# Altium PCB miwi.PcbDoc
Units mil, origin at the board's own origin, x right, y up, seen from the top; angles counter-clockwise.
Board outline 6000 x 4000 mil, 2 copper layers (Top Layer, Bottom Layer); 28 components, 35 nets, 108 pads, 0 vias.
Unrouted connection lines stored in the file: 2.
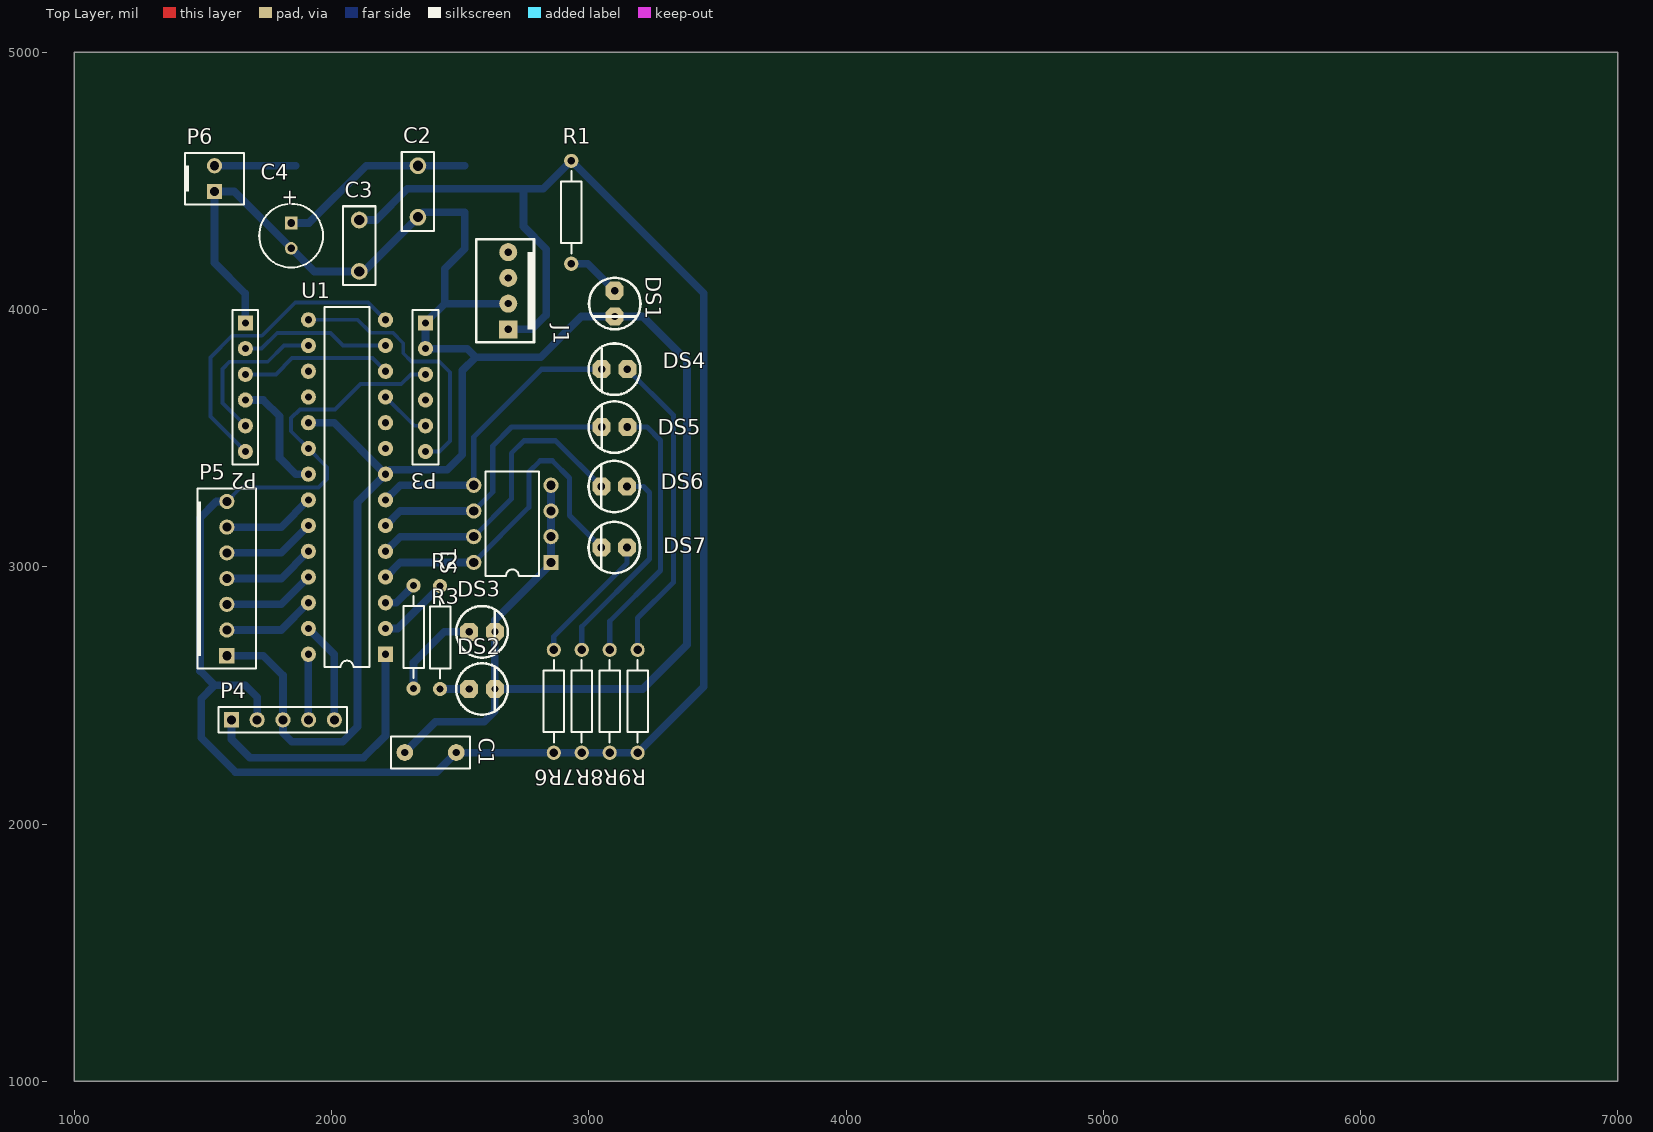
[diagram p0: Top Layer view]
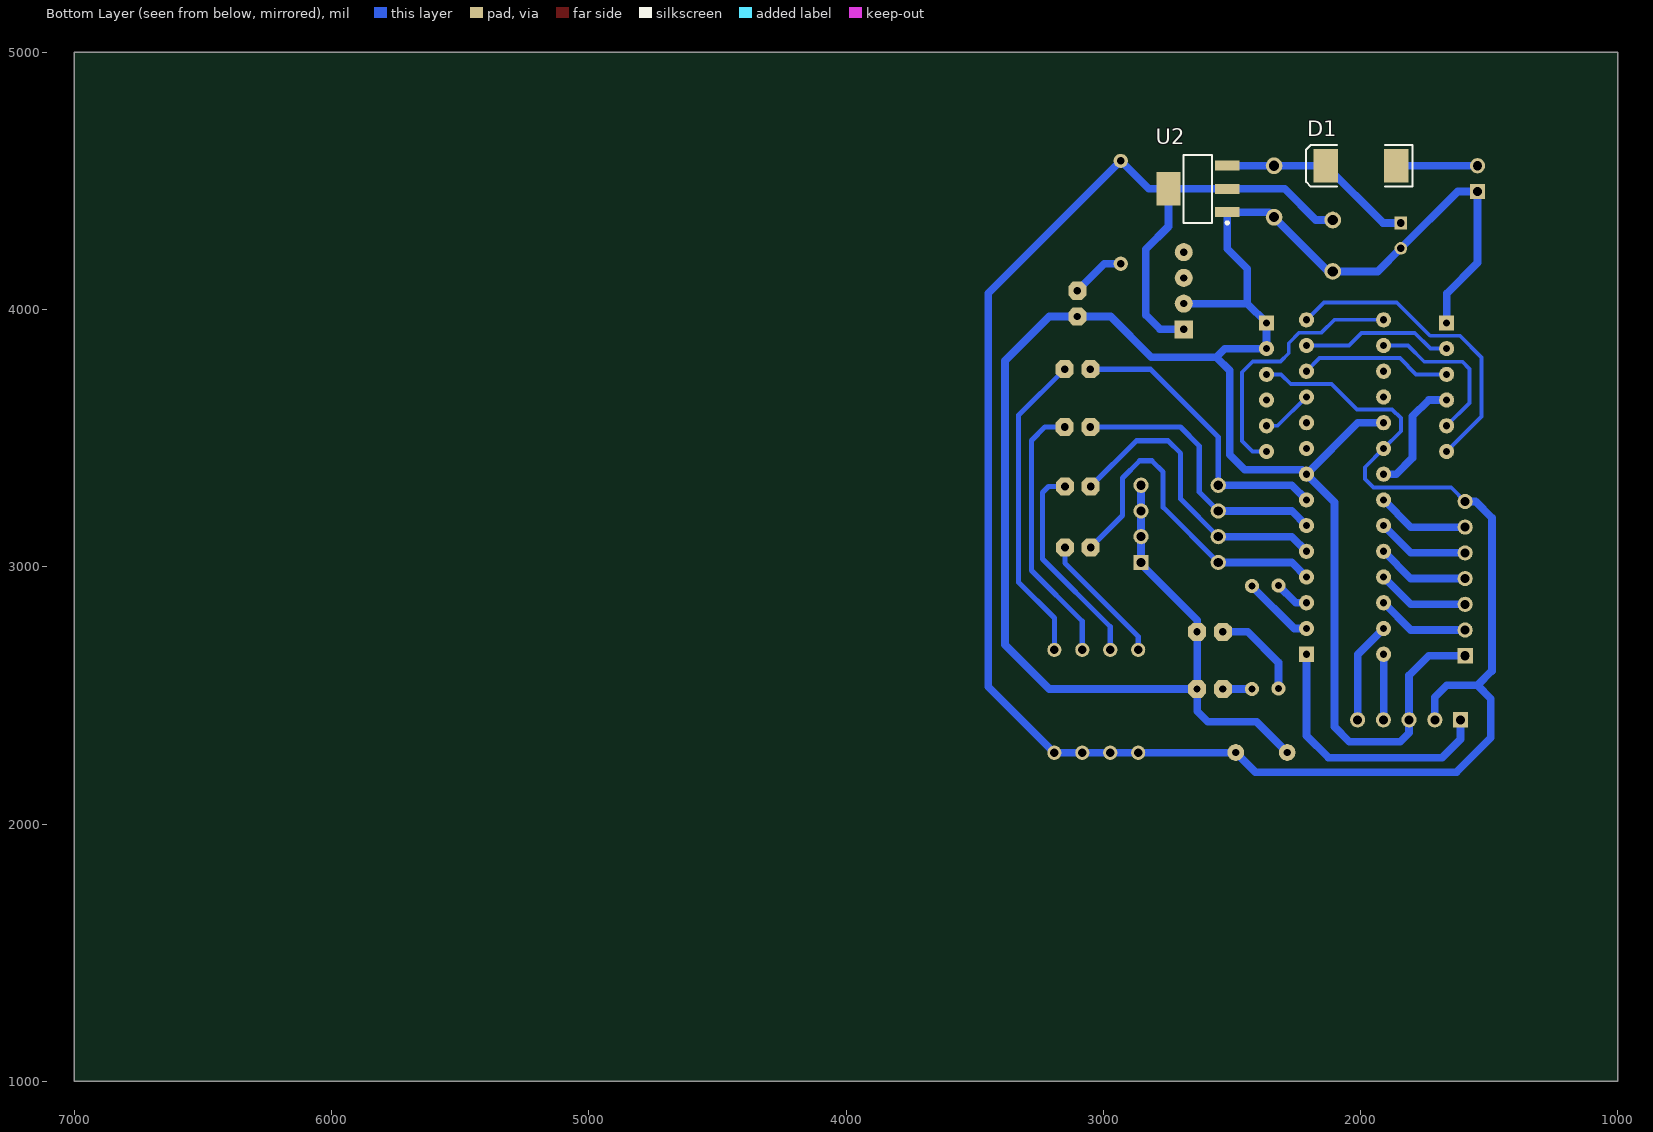
[diagram p1: Bottom Layer view, seen from below]

## Layer stack, top to bottom
Top Layer: signal copper 1.4
Dielectric: dielectric 12.6, FR-4, Dk 4.8
Bottom Layer: signal copper 1.4

## Board outline
1000,1000 7000,1000 7000,5000 1000,5000

## Design rules (kind name [scope] priority, off if disabled: settings)
Clearance ground_plane [(IsRegion AND InNet('GND'))] p1: gap=20
Clearance [All] p2: gap=5
ComponentClearance [All] p1: gap=5 collisioncheckmode=3 verticalgap=10 showdistances=FALSE
FabricationTestPointUsage TestPointUsage [All] p1: valid=0 allowmultiple=FALSE
FabricationTestpoint Testpoint [All] p1: side=3 testpointundercomponent=TRUE minsize=40 maxsize=100 preferedsize=60 minholesize=0 maxholesize=40 preferedholesize=32 testpointgrid=1 allowsidetop=TRUE allowsidebottom=TRUE usegrid=TRUE gridtolerance=0.01
PolygonConnect [All] p1: connectstyle=Relief reliefconductorwidth=10 reliefentries=4 polygonreliefangle="90 Angle"
RoutingVias [All] p1: holewidth=28 width=50 viastyle="Through Hole" minholewidth=28 minwidth=50 maxholewidth=28 maxwidth=50
SilkscreenOverComponentPads [All] p1: minsilkscreentomaskgap=10
SolderMaskExpansion [All] p1: expansion=4
Width [All] p1: maxlimit=30 minlimit=10 preferedwidth=30
24 further rules are at their usual default settings.

## Components (designator, comment, footprint, x,y, rotation, side; value= is the part's Value field where it differs from the comment)
C1 "" CAPR5.08-7.8x3.2#1 2385,2278 r0 top
C2 "" CAPR5.08-7.8x3.2#2 2336,4459 r90 top
C3 "" CAPR5.08-7.8x3.2#2 2108,4248 r90 top
C4 "" CAPPR2.5-6.3x5 1843,4287 r270 top
D1 "MULTICOMP - S3J - DIODE, STANDARD, 3A, 600V, SMD" SMC 1998,4559 r0 bottom
DS1 "LED" LED#1 3101,4073 r270 top
DS2 "LED" LED#1 2535,2525 r0 top
DS3 "LED" LED#1 2535,2747 r0 top
DS4 "LED" LED#2 3150,3768 r180 top
DS5 "LED" LED#2 3150,3543 r180 top
DS6 "LED" LED#2 3149,3312 r180 top
DS7 "LED" LED#2 3149,3075 r180 top
J1 "MOLEX4" MOLEX4 2687,3923 r270 top
P2 "Header 6" HDR1X6 1665,3948 r270 top
P3 "Header 6" HDR1X6 2365,3948 r270 top
P4 "ICSP" HDR1X5 1611,2405 r0 top
P5 "PS2" "KK Header 6410-7" 1593,2654 r90 top
P6 "12V Input" "KK Header 6410-2" 1545,4459 r90 top
R1 "" AXIAL-0.4#1 2932,4378 r90 top
R2 "" AXIAL-0.4#1 2422,2725 r90 top
R3 "" AXIAL-0.4#1 2319,2727 r90 top
R6 "Res2" AXIAL-0.4#2 2864,2477 r270 top
R7 "Res2" AXIAL-0.4#2 2972.67,2477 r270 top
R8 "Res2" AXIAL-0.4#2 3081.33,2477 r270 top
R9 "Res2" AXIAL-0.4#2 3190,2477 r270 top
S1 "SW-DIP4" DIP-8 2703,3167 r90 top
U1 "PIC18F25K20" PDIP-28 2060,3310 r90 top
U2 "LD1117S33CTR" MP04A_N 2632,4469 r0 bottom

## Footprints (in the part's own frame and the unit in brackets; to place one, negate y for a bottom-side part, rotate by r counter-clockwise, add the part's x,y. Pads: shape width x height; smd on the part's side, far side on the other; paste and mask are expansions set on the pad)
AXIAL-0.4#1 [mm] "Resistor; 2 Leads"
  round 1.4 hole 0.711: 1(-5.08,0) 2(5.08,0)
  silkscreen extent -4.06,-1.02 4.06,1.02
AXIAL-0.4#2 [mm] "Resistor; 2 Leads"
  round 1.4 hole 0.85: 1(-5.08,0) 2(5.08,0)
  silkscreen extent -4.06,-1.02 4.06,1.02
CAPPR2.5-6.3x5 [mm] "Capacitor, Electrolytic, Radial; Body 6.3 x 5 mm (Dia.xH typ); Pin Spacing 2.5 mm (typ)"
  rect 1.25x1.25 hole 0.75: 1(-1.25,0)
  round 1.25 hole 0.75: 2(1.25,0)
  silkscreen extent -3.15,-3.15 3.15,3.15
CAPR5.08-7.8x3.2#1 [mm] "Capacitor, Ceramic, Thru-Hole, Dipped Radial; Body 7.8 x 3.2 mm (WxT) Pin Spacing 5.08 mm (typ)"
  round 1.65 hole 0.711: 1(-2.54,0) 2(2.54,0)
  silkscreen extent -3.9,-1.6 3.9,1.6
CAPR5.08-7.8x3.2#2 [mm] "Capacitor, Ceramic, Thru-Hole, Dipped Radial; Body 7.8 x 3.2 mm (WxT) Pin Spacing 5.08 mm (typ)"
  round 1.65 hole 1: 1(-2.54,0) 2(2.54,0)
  silkscreen extent -3.9,-1.6 3.9,1.6
DIP-8 [mm] "DIP; 8 Leads; Row Spacing 7.62 mm; Pitch 2.54 mm"
  rect 1.5x1.5 hole 0.9: 1(-3.81,-3.81)
  round 1.5 hole 0.9: 2(-1.27,-3.81) 3(1.27,-3.81) 4(3.81,-3.81) 5(3.81,3.81) 6(1.27,3.81) 7(-1.27,3.81) 8(-3.81,3.81)
  silkscreen extent -5.15,-2.65 5.15,2.65
HDR1X5 [mm] "Connector; Header; 5 Position"
  rect 1.5x1.5 hole 0.9: 1(0,0)
  round 1.5 hole 0.9: 2(2.54,0) 3(5.08,0) 4(7.62,0) 5(10.16,0)
  silkscreen extent -1.27,-1.27 11.43,1.27
HDR1X6 [mm] "Connector; Header; 6 Position"
  rect 1.5x1.5 hole 0.711: 1(0,0)
  round 1.5 hole 0.711: 2(2.54,0) 3(5.08,0) 4(7.62,0) 5(10.16,0) 6(12.7,0)
  silkscreen extent -1.27,-1.27 13.97,1.27
"KK Header 6410-2" [mm]
  rect 1.5x1.5 hole 0.9: 1(0,0)
  round 1.5 hole 0.9: 2(2.54,0)
  silkscreen extent -1.27,-2.9 3.81,2.9
"KK Header 6410-7" [mm]
  rect 1.5x1.5 hole 0.9: 1(0,0)
  round 1.5 hole 0.9: 2(2.54,0) 3(5.08,0) 4(7.62,0) 5(10.16,0) 6(12.7,0) 7(15.24,0)
  silkscreen extent -1.27,-2.9 16.51,2.9
LED#1 [mil]
  oct 70x70 hole 28: 1(0,0) 2(100,0)
  silkscreen extent -50,-100 150,100
LED#2 [mil]
  oct 70x70 hole 30: 1(0,0) 2(100,0)
  silkscreen extent -50,-100 150,100
MOLEX4 [mil] "MOLEX4"
  rect 70x70 hole 28: 1(0,0)
  round 70 hole 28: 2(-100,0) 3(-200,0) 4(-300,0)
  silkscreen extent -350,-125 50,100
MP04A_N [mm] "SOT223, 4-Leads, Body 6.5x3.5mm, Pitch 2.3mm, Lead Span 7mm, IPC Medium Density"
  rect 2.4x1 smd: 1(-2.9,2.3) 2(-2.9,0) 3(-2.9,-2.3)
  rect 2.4x3.3 smd: 4(2.9,0)
  silkscreen extent -3.02,-3.35 1.4,3.47, body extent -1.85,-3.35 1.85,3.35, height 1.8
PDIP-28 [mm] "PDIP-28"
  rect 1.5x1.5 hole 0.711: 1(-16.51,-3.81)
  round 1.5 hole 0.711: 2(-13.97,-3.81) 3(-11.43,-3.81) 4(-8.89,-3.81) 5(-6.35,-3.81) 6(-3.81,-3.81) 7(-1.27,-3.81) 8(1.27,-3.81) 9(3.81,-3.81) 10(6.35,-3.81) 11(8.89,-3.81) 12(11.43,-3.81) 13(13.97,-3.81) 14(16.51,-3.81) 15(16.51,3.81) 16(13.97,3.81) 17(11.43,3.81) 18(8.89,3.81) 19(6.35,3.81) 20(3.81,3.81) 21(1.27,3.81) 22(-1.27,3.81) 23(-3.81,3.81) 24(-6.35,3.81) 25(-8.89,3.81) 26(-11.43,3.81) 27(-13.97,3.81) 28(-16.51,3.81)
  silkscreen extent -17.78,-2.23 17.78,2.23
SMC [mm] "DO-214-AB/SMC; 2 C-Bend Leads; Body 7.9 x 5.9 mm, inc. leads (LxW)"
  rect 2.4x3.3 smd: 1(-3.475,0) 2(3.475,0)
  silkscreen extent -5.07,-2.05 5.43,2.05

## Part data
C1 C2 C3: library part Cap, "Capacitor"
C4: library part "Cap Pol1", "Polarized Capacitor (Radial)"
D1: library part Diode, "Default Diode"
P2 P3: "Header, 6-Pin"
P4: library part "Header 5", "Header, 5-Pin"
P5: library part "Header 7 Type 1", "Header, 7-Pin, KK Header 6410, 100mil"
P6: library part "Header 2 Type 1", "Header, 2-Pin, KK Header 6410, 100mil"
R1 R2 R3: library part Res2, "Resistor"
R6 R7 R8 R9: "Resistor"
S1: "DIP Switch"
U2: library part LM1117IMPX-3.3, "800mA Low-Dropout Linear Regulator, 4-pin SOT-223"

## Nets (pads, with @x,y where several pads share a name; then routed paths per layer and width w, separated by ;. In a path a pad name is that pad's centre, name@x,y a point inside that pad or via, vN(x,y) a via of type N, cw(c..) or ccw(c..) an arc to the next point about the centre after c; other vN are vias at no path point)
12V: C2.2 C4.1 D1.2 U2.3 | length 766.6
  Bottom Layer w30: C4.1 1912.02,4336.21 D1.2 C2.2 U2.3@2517.28,4559
/CS: P3.5 U1.11 | length 201.4
  Bottom Layer w15: U1.11 2322,3548 P3.5
/MIWI_RST: P2.2 U1.13 | length 590.6
  Bottom Layer w15: P2.2 1728,3848 1789,3909 1996,3909 2045,3860 U1.13
ACK: P5.2 U1.26 | length 360.9
  Bottom Layer w30: P5.2 1804,2754 U1.26
ATT: P5.3 U1.25 | length 360.9
  Bottom Layer w30: P5.3 1804,2854 U1.25
CLKOUT: P3.4
CLOCK: P5.6 U1.22 | length 360.9
  Bottom Layer w30: P5.6 1804,3154 U1.22
CMD: P5.5 U1.23 | length 360.9
  Bottom Layer w30: P5.5 1804,3054 U1.23
DATA: P5.4 U1.24 | length 360.9
  Bottom Layer w30: P5.4 1804,2954 U1.24
GND: C1.1 C2.1 C3.1 C4.2 DS1.2 DS2.2 DS3.2 J1.2 P2.1 P3.1 P3.2 P4.3 P5.1 P6.1 S1.1 S1.2 S1.3 S1.4 U1.8 U1.19 U2.1 | length 10012.7
  Bottom Layer w30: P5.1 1735,2654 1811,2578 P4.3 1811,2355 1846,2320 2043,2320 2101,2378 2101,3251 U1.8 ; P2.1 1665,4062 1545,4182 P6.1 1621.79,4459 C4.2 1932.79,4148 C3.1 2125,4148 C2.1 2355.45,4378.45 U2.1 2517.83,4235.83 2440,4158 2440,4023 ; U1.19 2010,3560 U1.8 ; C1.1 2404,2397 2593,2397 2635,2439 DS2.2 ; J1.2 2440,4023 ; S1.1 S1.2 S1.3 S1.4 ; S1.1@2856.5,3013.5 2635,2792 DS3.2 DS2.2 ; U1.8 2227,3377 2450,3377 2508,3435 2508,3763 2560,3815 ; 2440,4023 P3.1 P3.2 2527,3848 2560,3815 ; 2560,3815 2813,3815 2971,3973 DS1.2 3210,3973 3382,3801 3382,2697 3210,2525 DS2.2
INT: P2.4 U1.21 | length 459.2
  Bottom Layer w30: P2.4 1735,3648 1798,3585 1798,3423 1861,3360 U1.21
MCU_RX: J1.4 U1.18
MCU_TX: J1.3 U1.17
NetD1_1: D1.1 P6.2 | length 316.2
  Bottom Layer w30: P6.2 D1.1
NetDS1_1: DS1.1 R1.1 | length 212.5
  Bottom Layer w30: R1.1 2996,4178 DS1.1
NetDS2_1: DS2.1 R2.1 | length 113
  Bottom Layer w30: R2.1 DS2.1
NetDS3_1: DS3.1 R3.1 | length 366.3
  Bottom Layer w30: R3.1 2319,2628 2438,2747 DS3.1
NetDS4_1: DS4.1 R9.1 | length 1222.7
  Bottom Layer w20: DS4.1 3329,3589 3329,2940 3190,2801 R9.1
NetDS4_2: DS4.2 S1.5 U1.7 | length 1160.5
  Bottom Layer w20: S1.5 2553,3505 2816,3768 DS4.2
  Bottom Layer w30: U1.7 2267,3317 S1.5
NetDS5_1: DS5.1 R8.1 | length 1046.4
  Bottom Layer w20: R8.1 3081.33,2788.33 3279,2986 3279,3491 3227,3543 DS5.1
NetDS5_2: DS5.2 S1.6 U1.6 | length 1103.5
  Bottom Layer w20: S1.6 2627,3291 2627,3470 2700,3543 DS5.2
  Bottom Layer w30: U1.6 2267,3217 S1.6
NetDS6_1: DS6.1 R7.1 | length 817.6
  Bottom Layer w20: R7.1 2972.67,2766.67 3236,3030 3236,3289 3213,3312 DS6.1
NetDS6_2: DS6.2 S1.7 U1.5 | length 1195.1
  Bottom Layer w20: S1.7 2699,3263 2699,3441 2748,3490 2871,3490 DS6.2
  Bottom Layer w30: U1.5 2267,3117 S1.7
NetDS7_1: DS7.1 R6.1 | length 516.1
  Bottom Layer w20: R6.1 2864,2729 3149,3014 DS7.1
NetDS7_2: DS7.2 S1.8 U1.4 | length 1331.6
  Bottom Layer w20: S1.8 2767,3231 2767,3368 2811,3412 2858,3412 2925,3345 2925,3199 DS7.2
  Bottom Layer w30: U1.4 2267,3017 S1.8
NetR2_2: R2.2 U1.2 | length 280.3
  Bottom Layer w30: U1.2 2257,2760 R2.2
NetR3_2: R3.2 U1.3 | length 136.8
  Bottom Layer w30: U1.3 2252,2860 R3.2
PGC: P4.5 U1.27 | length 396.8
  Bottom Layer w30: U1.27 2011,2659 P4.5
PGD: P4.4 U1.28 | length 254
  Bottom Layer w30: P4.4@1910,2406 U1.28
SCK: P2.6 U1.14 | length 1220.1
  Bottom Layer w15: P2.6 1529,3584 1529,3814 1613,3898 1729,3898 1859,4028 2142,4028 U1.14
SDI: P2.5 U1.16 | length 629.6
  Bottom Layer w15: P2.5 1576,3637 1576,3769 1604,3797 1752,3797 1815,3860 U1.16
SDO: P3.6 U1.15 | length 1038.3
  Bottom Layer w15: U1.15 2102,3960 2152,3910 2238,3910 2279,3869 2279,3830 2311,3798 2419,3798 2461,3756 2461,3489 2420,3448 P3.6
VCC: C1.2 C3.2 J1.1 P3.3 P4.2 P5.7 R1.2 R6.2 R7.2 R8.2 R9.2 U1.20 U2.2 U2.4 | length 8638.2
  Bottom Layer w15: P5.7 1647,3308 1950,3308 1983,3341 1983,3387 U1.20 1843,3527 1843,3578 1877,3612 2014,3612 2112,3710 2271,3710 2309,3748 P3.3
  Bottom Layer w30: P5.7 1553,3254 1489,3190 1489,2595 1545,2539 ; P4.2 1711,2493 1665,2539 1545,2539 ; C3.2 2174,4348 2295,4469 U2.2 U2.4 ; C1.2 2408,2201 1627,2201 1493,2335 1493,2487 1545,2539 ; C1.2@2486,2277 R6.2 R7.2 R8.2 R9.2 3447,2534 3447,4063 R1.2 2823,4469 U2.4 ; J1.1 2779,3923 2835,3979 2835,4234 2746.17,4322.83 U2.4
VPP: P4.1 U1.1 | length 1057.4
  Bottom Layer w30: P4.1 1611,2329 1683,2257 2124,2257 2210,2343 U1.1
WAKE: P2.3 U1.12 | length 592.2
  Bottom Layer w15: P2.3 1784,3748 1847,3811 2159,3811 U1.12
pads on no net: U1.9 U1.10

## Text inside footprints (layer, text, board x,y; h text height)
C4: Top Overlay "+" at 1813.47,4469.09 h59.06 r270